# Allegro board VCU16.brd
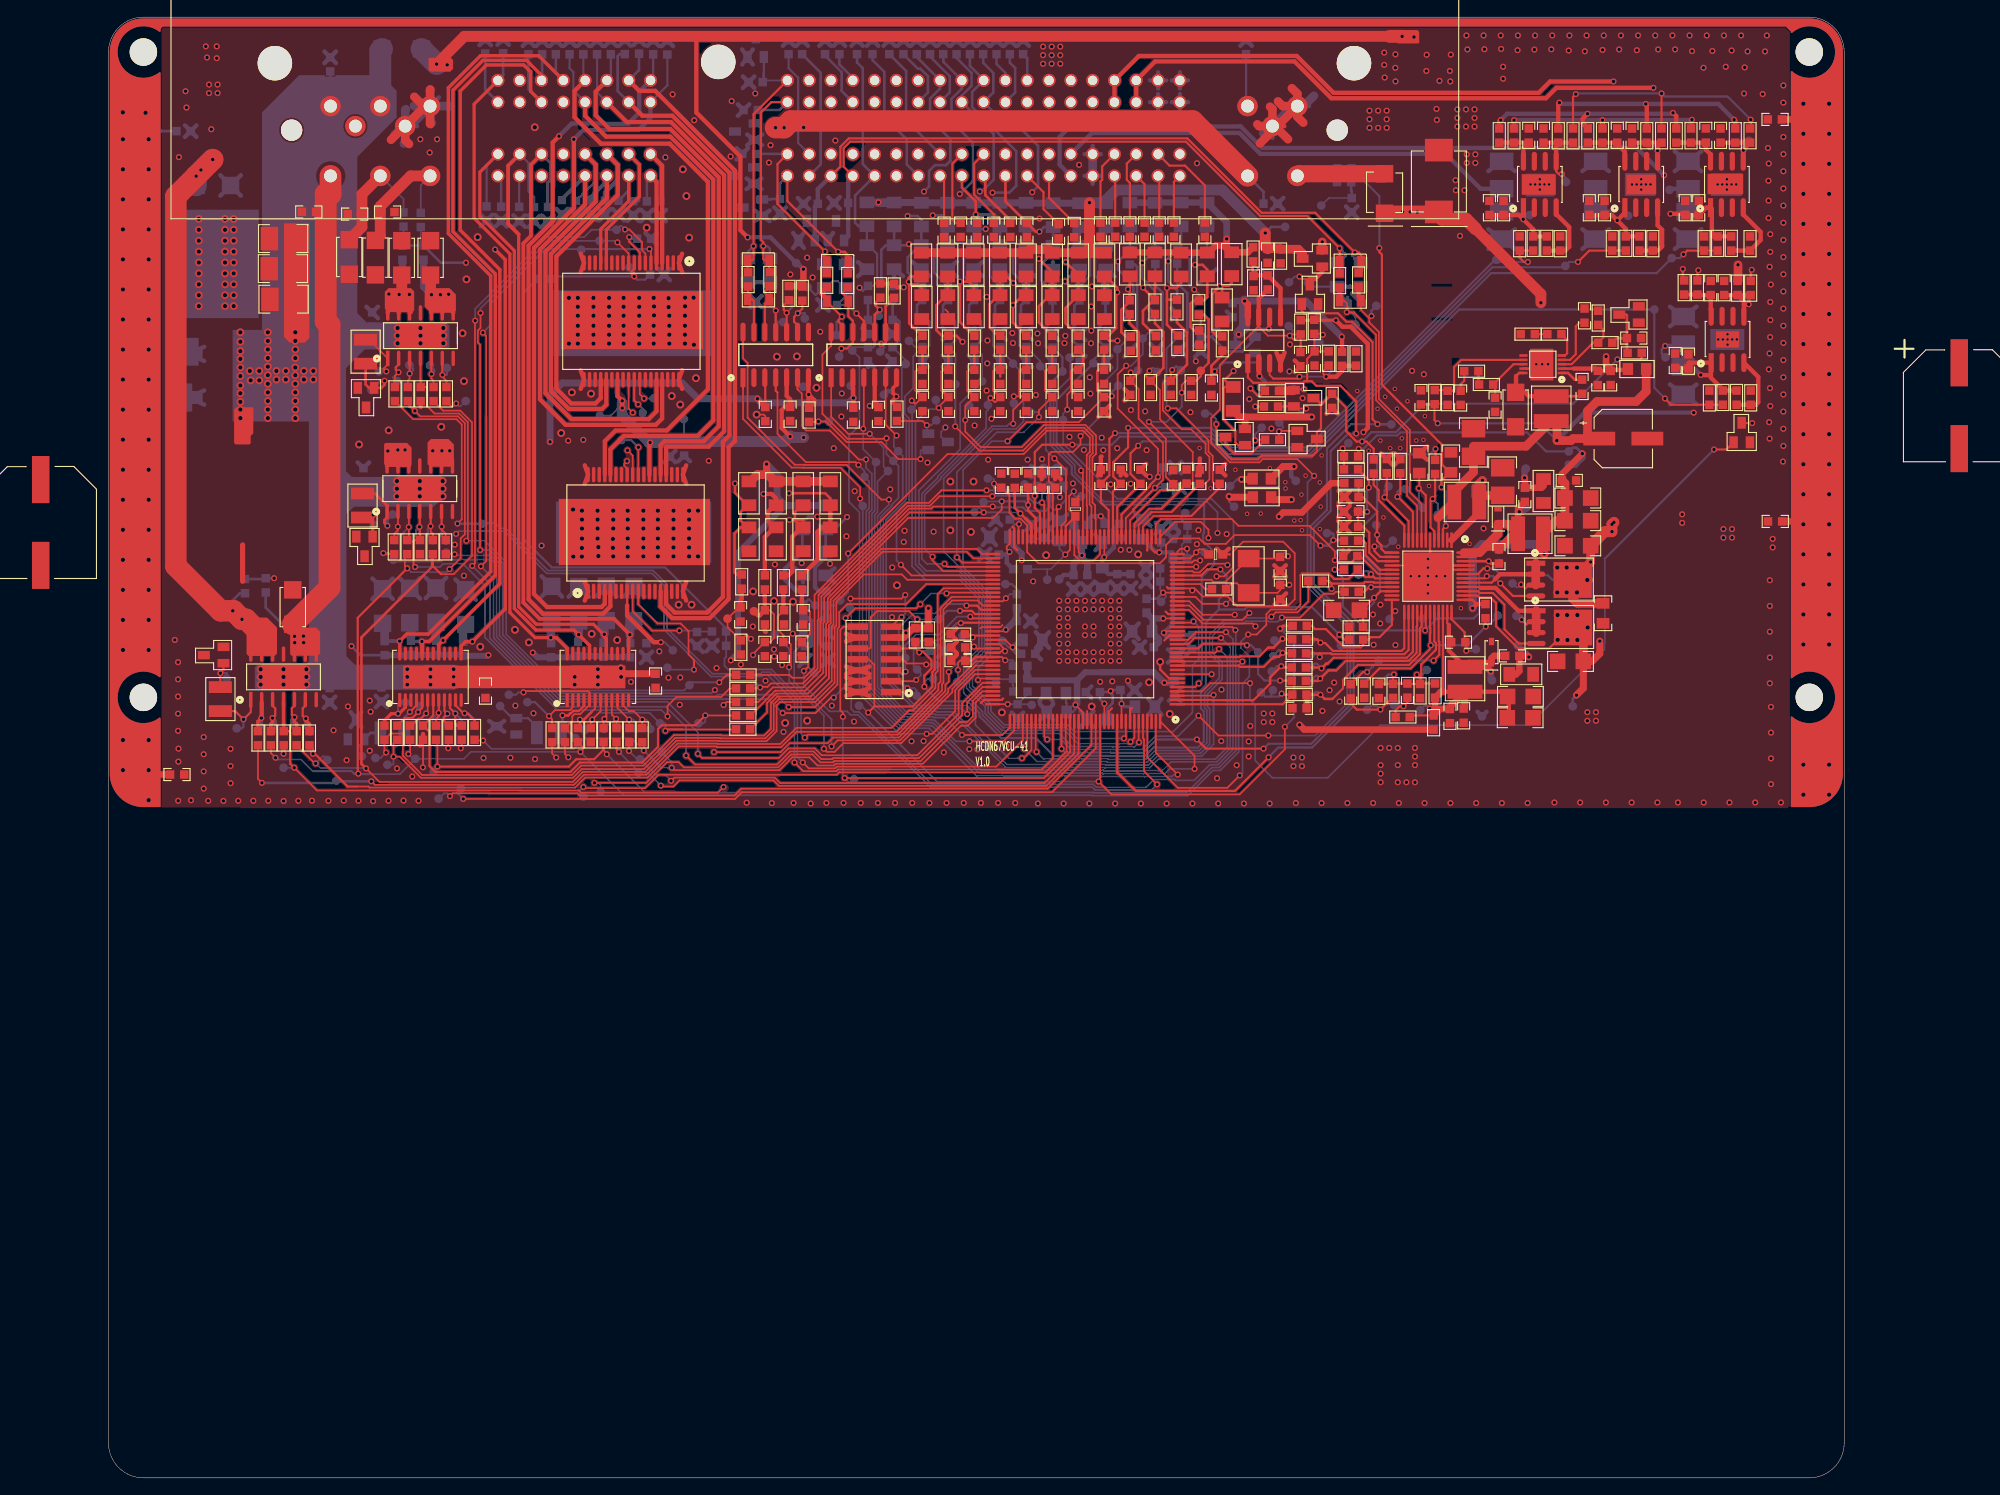
[diagram p0: board, top side]
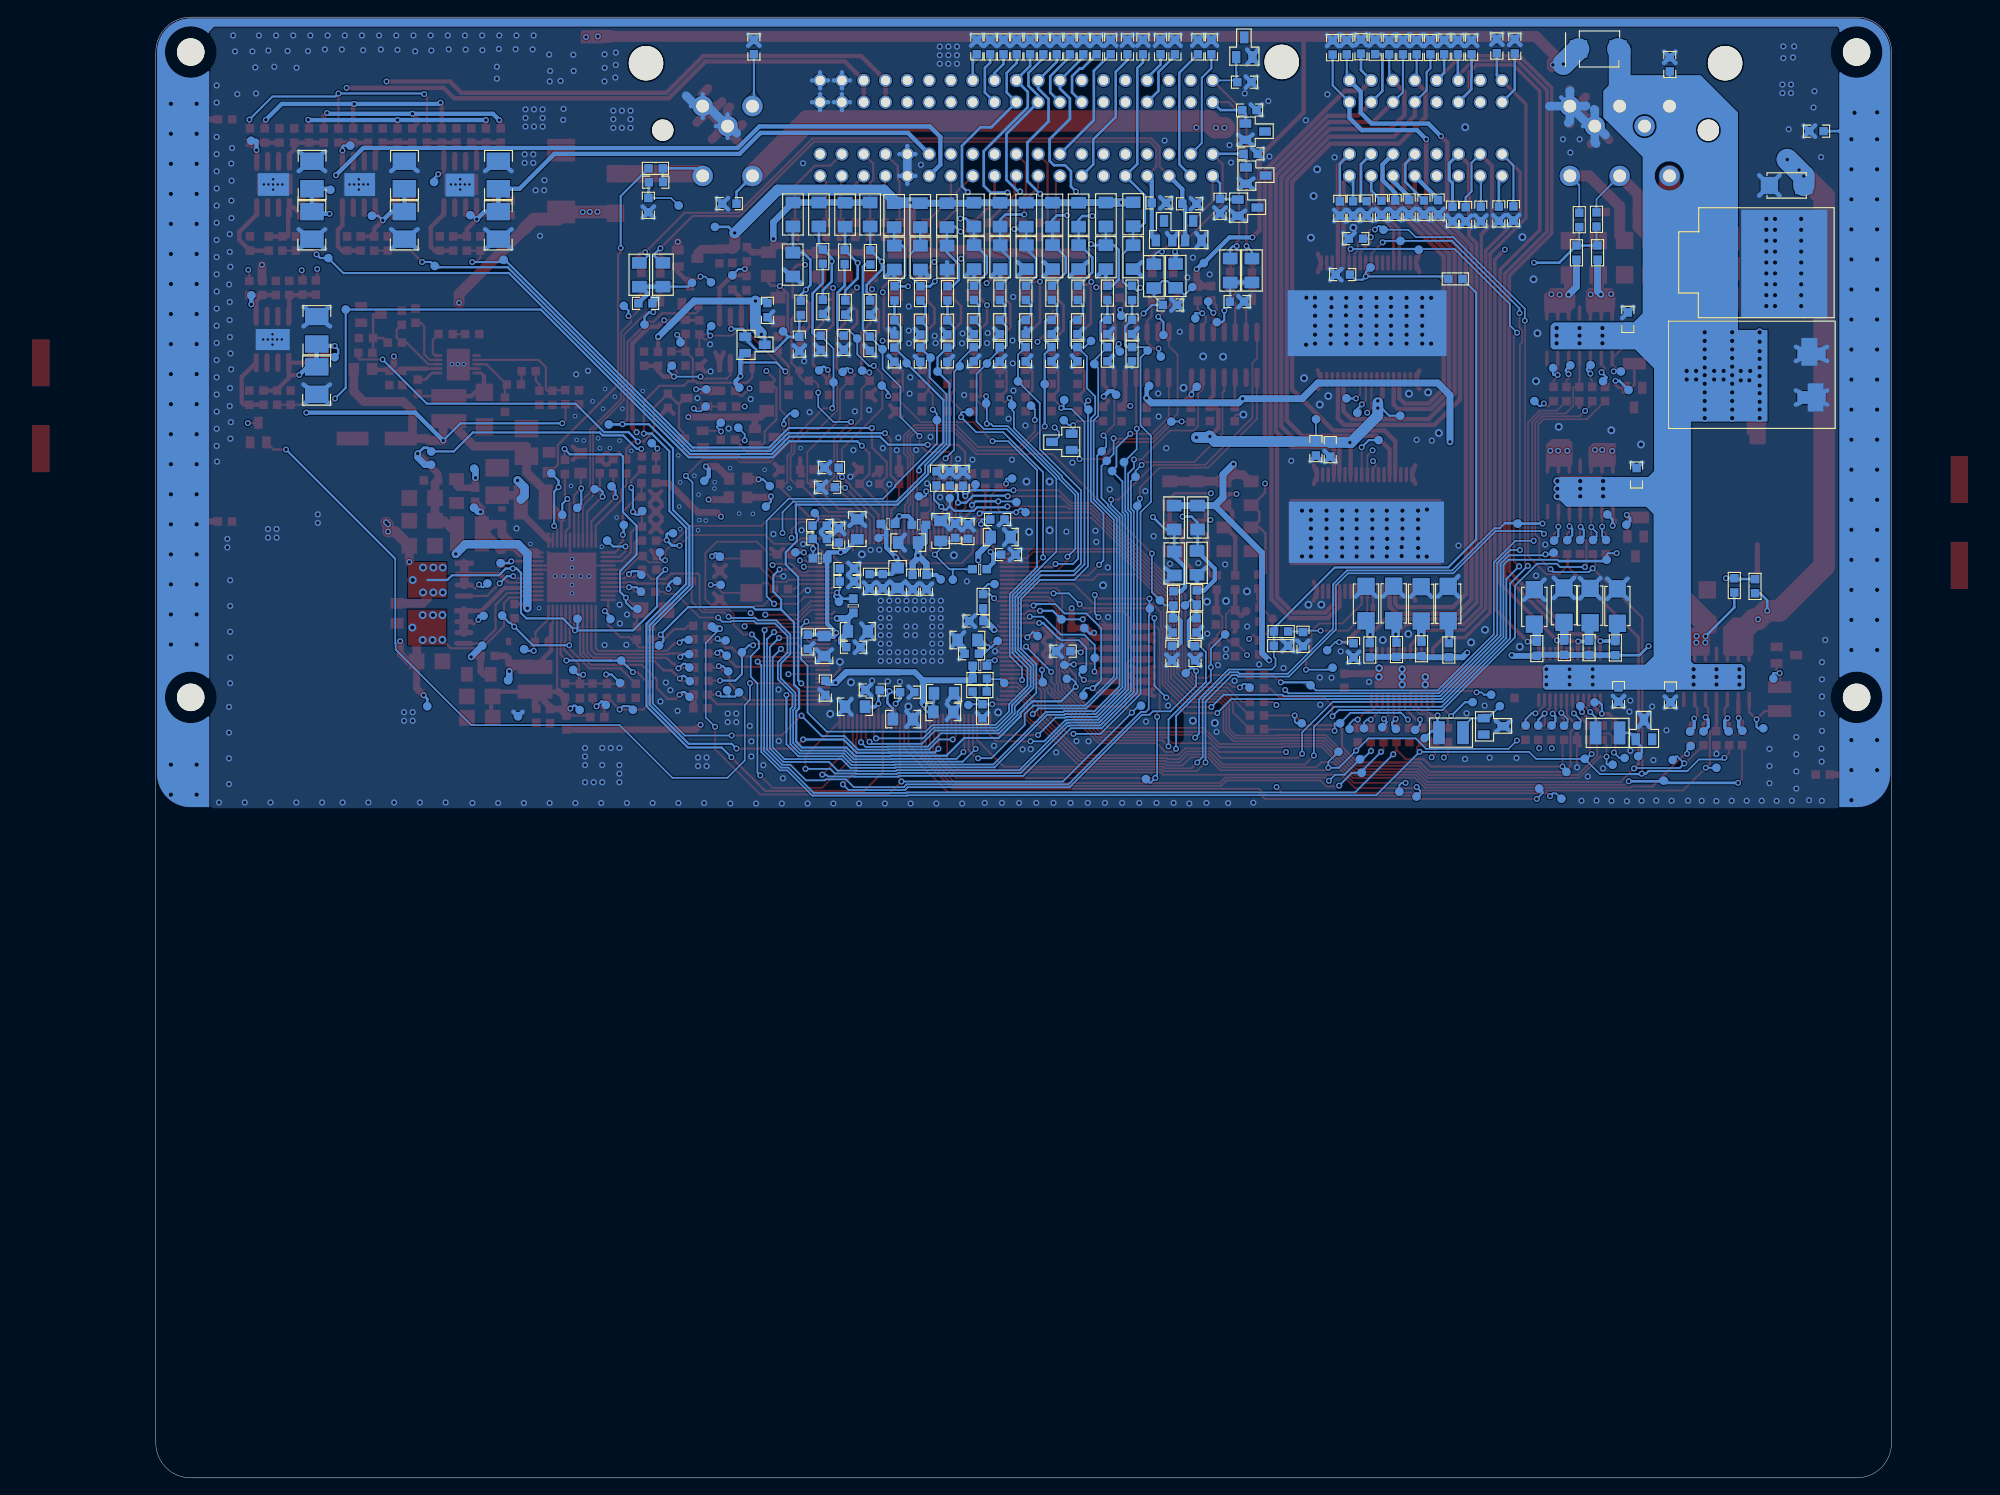
[diagram p1: board, bottom side, seen from below]

Outline 202.18 x 170.18 mm; copper layers: TOP, GND, PWR, BOTTOM. Coordinates in mm from the lower left corner of the outline.
Outline path: 0,166.12 arc(1.19,168.99) 4.06,170.18 198.12,170.18 arc(200.99,168.99) 202.18,166.12 202.18,4.06 arc(200.99,1.19) 198.12,0 4.06,0 arc(1.19,1.19) 0,4.06 0,166.12

## Design rules (mm)
constraint set DEFAULT: min track width 0.203, pair gap 10
nets with their own width: min track width 0.5; nets N32087005 N32087036 N32087068 N32087102 N32087127 N32087157 N32087196 N32087239

## Placement (name value [footprint] x y rotation side)
C200  22uF,10V  [CAPM1206X135]  171.16 114.15 0 top
C201  22uF,10V  [CAPM1206X135]  171.16 111.51 0 top
C202  10nF  [CAPM0603X85]  170.13 116.21 0 top
C203  2.2nF  [CAPM0603X85]  164.98 114.53 90 top
C204  2.2nF  [CAPM0603X85]  163.52 95.77 0 top
C205  100nF  [CAPM0603X85]  161.97 107.35 270 top
C206  22uF,10V  [CAPM1206X135]  164.44 88.54 0 top
C207  100nF  [CAPM0603X85]  156.26 88.75 270 top
C208  100nF  [CAPM0603X85]  157.23 97.36 0 top
C209  22uF,10V  [CAPM1206X135]  164.47 91.03 0 top
C210  10nF,100V  [CAPM0603X85]  143.92 150.96 0 bottom
C211  330uF,50V  [CAPPA450-1250X1350]  215.59 124.91 0 top
C212  4.7uF  [CAPM1210X200]  159 120.62 90 top
C213  4.7uF  [CAPM1210X200]  162.41 116.08 90 top
C214  220pF  [CAPM0603X85]  151.31 91.72 90 top
C215  10nF,100V  [CAPM0603X85]  144.81 148.28 270 bottom
C216  330pF  [CAPM0603X85]  157.86 88.81 270 top
C217  1nF  [CAPM0603X85]  144.7 91.64 90 top
C218  1uF,50V  [CAPM0805X110]  156.37 118.55 90 top
C219  1uF,50V  [CAPM0805X110]  174.09 100.48 270 top
C220  22pF  [CAPM0603X85]  147.98 91.67 270 top
C221  4.7uF,25V  [CAPM1206X135]  171.16 108.59 180 top
C222  1uF,50V  [CAPM0805X110]  152.69 117.99 270 top
C223  4.7uF,25V  [CAPM1206X135]  170.3 95.13 180 top
C224  2.2nF  [CAPM0603X85]  104 116.18 90 top
C225  1nF  [CAPM0603X85]  138.73 89.66 180 top
C226  10nF  [CAPM0603X85]  144.74 112.58 180 top
C227  4.7uF,25V  [CAPM1206X135]  144.22 101.09 180 top
C228  100nF  [CAPM0603X85]  135.02 142.38 270 top
C229  10nF,100V  [CAPM0603X85]  194.13 111.43 0 top
C230  10nF,100V  [CAPM0603X85]  8 81.94 180 top
C231  100nF  [CAPM0603X85]  25.82 164.68 270 bottom
C232  220uF,50V  [CAPPA450-1250X1600]  -7.9 111.31 0 top
C233  4.7uF  [CAPM1210X200]  20.4 137.31 0 top
C234  4.7uF  [CAPM1210X200]  20.32 140.87 0 top
C235  4.7uF  [CAPM1210X200]  20.35 144.37 0 top
C236  100nF  [CAPM0603X85]  25.76 91.19 90 bottom
C237  10nF,100V  [CAPM0603X85]  194.11 158.27 0 top
C238  10nF,100V  [CAPM0603X85]  8.75 156.9 180 bottom
C300  100nF  [CAPM0603X85]  186.64 138.63 90 top
C301  4.7uF  [CAPM1210X200]  183.44 127.84 90 bottom
C302  4.7uF  [CAPM1210X200]  183.44 133.71 270 bottom
C304  100nF  [CAPM0603X85]  184.05 130.07 90 top
C305  10nF,100V  [CAPM0603X85]  182.5 130.15 90 top
C306  100nF  [CAPM0603X85]  188.2 138.63 90 top
C400  10nF,100V  [CAPM0603X85]  106.98 145.39 270 top
C401  4.7nF  [CAPM0603X85]  109.98 130.86 270 bottom
C402  10nF,100V  [CAPM0603X85]  105.05 145.39 270 top
C403  4.7nF  [CAPM0603X85]  113.13 130.86 270 bottom
C404  10nF,100V  [CAPM0603X85]  101.19 145.39 270 top
C405  4.7nF  [CAPM0603X85]  103.89 130.91 270 bottom
C406  10nF,100V  [CAPM0603X85]  79.22 166.69 90 bottom
C407  4.7nF  [CAPM0603X85]  73.63 100.58 270 top
C408  10nF,100V  [CAPM0603X85]  80.8 166.69 90 bottom
C409  4.7nF  [CAPM0603X85]  76.45 96.55 270 top
C410  10nF,100V  [CAPM0603X85]  106.54 166.69 90 bottom
C411  4.7nF  [CAPM0603X85]  112.95 125.09 270 top
C412  10nF,100V  [CAPM0603X85]  103.44 166.69 90 bottom
C413  4.7nF  [CAPM0603X85]  109.93 125.09 270 top
C414  10nF,100V  [CAPM0603X85]  100.34 166.69 90 bottom
C415  4.7nF  [CAPM0603X85]  103.88 125.09 270 top
C416  4.7nF  [CAPM0603X85]  97.84 125.09 270 top
C417  10nF,100V  [CAPM0603X85]  97.24 166.69 90 bottom
C418  10nF,100V  [CAPM0603X85]  94.14 166.69 90 bottom
C419  4.7nF  [CAPM0603X85]  94.82 125.09 270 top
C420  10nF,100V  [CAPM0603X85]  83.46 166.69 90 bottom
C421  4.7nF  [CAPM0603X85]  80.92 100.25 270 top
C422  10nF,100V  [CAPM0603X85]  103.12 145.39 270 top
C423  4.7nF  [CAPM0603X85]  106.9 125.09 270 top
C424  10nF,100V  [CAPM0603X85]  99.26 145.39 270 top
C425  4.7nF  [CAPM0603X85]  100.86 125.09 270 top
C426  10nF,100V  [CAPM0603X85]  90.96 166.69 90 bottom
C427  4.7nF  [CAPM0603X85]  97.84 130.91 270 bottom
C428  10nF,100V  [CAPM0603X85]  89 166.69 90 bottom
C429  4.7nF  [CAPM0603X85]  83.82 96.09 270 bottom
C430  10nF,100V  [CAPM0603X85]  104.99 166.69 90 bottom
C431  4.7nF  [CAPM0603X85]  116.15 130.86 270 bottom
C432  4.7nF  [CAPM0603X85]  106.91 130.91 270 bottom
C433  10nF,100V  [CAPM0603X85]  101.89 166.69 90 bottom
C434  10nF,100V  [CAPM0603X85]  98.79 166.69 90 bottom
C435  4.7nF  [CAPM0603X85]  100.86 130.91 270 bottom
C436  10nF,100V  [CAPM0603X85]  95.69 166.69 90 bottom
C437  4.7nF  [CAPM0603X85]  94.82 130.91 270 bottom
C438  10nF,100V  [CAPM0603X85]  92.59 166.69 90 bottom
C439  4.7nF  [CAPM0603X85]  81.13 96.06 270 bottom
C440  10nF,100V  [CAPM0603X85]  85.14 166.69 90 bottom
C441  4.7nF  [CAPM0603X85]  78.61 96.55 270 top
C442  10nF,100V  [CAPM0603X85]  87.2 166.69 90 bottom
C443  4.7nF  [CAPM0603X85]  88.47 134.09 270 bottom
C444  10nF,100V  [CAPM0603X85]  132.51 166.69 90 bottom
C445  4.7nF  [CAPM0603X85]  115.97 128.27 270 top
C446  10nF,100V  [CAPM0603X85]  97.33 145.39 270 top
C447  4.7nF  [CAPM0603X85]  91.34 134.09 270 bottom
C500  10nF,100V  [CAPM0603X85]  124.1 145.41 270 top
C501  10nF,100V  [CAPM0603X85]  122.39 145.41 270 top
C502  10nF,100V  [CAPM0603X85]  120.68 145.41 270 top
C503  10nF,100V  [CAPM0603X85]  117.26 145.41 270 top
C504  10nF,100V  [CAPM0603X85]  127.71 145.41 270 top
C505  10nF,100V  [CAPM0603X85]  118.97 145.41 270 top
C506  10nF,100V  [CAPM0603X85]  115.55 145.41 270 top
C507  47nF  [CAPM0603X85]  124.03 116.59 90 top
C508  47nF  [CAPM0603X85]  127.13 116.64 90 top
C509  47nF  [CAPM0603X85]  125.58 116.66 90 top
C510  47nF  [CAPM0603X85]  123.91 115.41 0 bottom
C511  47nF  [CAPM0603X85]  129.43 116.64 90 top
C512  47nF  [CAPM0603X85]  123.46 117.7 0 bottom
C513  47nF  [CAPM0603X85]  110.27 116.19 90 top
C514  10nF,100V  [CAPM0603X85]  112.5 145.36 270 top
C515  10nF,100V  [CAPM0603X85]  110.67 145.24 270 top
C516  470pF  [CAPM0603X85]  128.47 127 270 top
C517  470pF  [CAPM0603X85]  127.23 132.11 270 bottom
C518  1nF  [CAPM0603X85]  140.48 130.41 270 top
C519  1nF  [CAPM0603X85]  138.85 130.33 270 top
C520  47nF  [CAPM0603X85]  130.94 136.04 270 bottom
C600  10nF,100V  [CAPM0603X85]  64.26 147.88 90 bottom
C601  10nF,100V  [CAPM0603X85]  62.71 147.9 90 bottom
C602  10nF,100V  [CAPM0603X85]  61.13 147.92 90 bottom
C603  10nF,100V  [CAPM0603X85]  59.42 147.98 90 bottom
C604  10nF,100V  [CAPM0603X85]  57.81 147.99 90 bottom
C605  10nF,100V  [CAPM0603X85]  56.18 148.04 90 bottom
C606  10nF,100V  [CAPM0603X85]  54.47 147.99 90 bottom
C607  10nF,100V  [CAPM0603X85]  52.81 148.03 90 bottom
C608  100nF  [CAPM0603X85]  67.05 119.93 270 bottom
C609  100nF  [CAPM0603X85]  62.38 144.37 0 bottom
C610  10nF,100V  [CAPM0603X85]  65.1 166.65 270 bottom
C611  10nF,100V  [CAPM0603X85]  63.45 166.67 270 bottom
C612  10nF,100V  [CAPM0603X85]  61.8 166.75 270 bottom
C613  10nF,100V  [CAPM0603X85]  60.15 166.7 270 bottom
C614  10nF,100V  [CAPM0603X85]  56.91 166.67 270 bottom
C615  10nF,100V  [CAPM0603X85]  58.51 166.67 270 bottom
C616  10nF,100V  [CAPM0603X85]  53.71 166.67 270 bottom
C617  10nF,100V  [CAPM0603X85]  55.31 166.67 270 bottom
C618  100nF  [CAPM0603X85]  65.38 119.81 270 bottom
C619  100nF  [CAPM0603X85]  62.66 96.42 270 bottom
C700  100nF  [CAPM0603X85]  63.73 92.86 270 top
C701  100pF  [CAPM0603X85]  107.12 116.19 90 top
C702  10nF,100V  [CAPM0603X85]  45.97 166.8 90 bottom
C703  10nF,100V  [CAPM0603X85]  51.14 147.24 270 bottom
C704  10nF,100V  [CAPM0603X85]  49.6 147.22 270 bottom
C705  10nF,100V  [CAPM0603X85]  44.04 147.31 270 bottom
C706  100nF  [CAPM0603X85]  43.91 91.68 270 top
C707  100pF  [CAPM0603X85]  105.56 116.16 90 top
C708  10nF,100V  [CAPM0603X85]  52.11 166.67 90 bottom
C709  10nF,100V  [CAPM0603X85]  47.84 147.25 270 bottom
C710  10nF,100V  [CAPM0603X85]  48.91 166.67 90 bottom
C711  10nF,100V  [CAPM0603X85]  50.51 166.67 90 bottom
C800  100nF  [CAPM0603X85]  30.71 134.95 90 bottom
C801  100pF  [CAPM0603X85]  108.15 116.41 90 bottom
C802  10nF,100V  [CAPM0603X85]  45.74 147.27 270 bottom
C803  10nF,100V  [CAPM0603X85]  43.88 166.77 90 bottom
C804  100nF  [CAPM0603X85]  29.69 116.81 90 bottom
C805  10nF,100V  [CAPM0603X85]  135.37 148.45 0 bottom
C806  10nF,100V  [CAPM0603X85]  23.35 147.48 180 top
C807  100pF  [CAPM0603X85]  111.25 116.44 90 bottom
C808  100nF  [CAPM0603X85]  31.8 91.26 270 bottom
C809  100pF  [CAPM0603X85]  109.69 116.42 90 bottom
C810  10nF,100V  [CAPM0603X85]  28.7 147.24 180 top
C811  10nF,100V  [CAPM0603X85]  32.49 147.47 0 top
C900  47nF  [CAPM0603X85]  112.42 104.37 270 bottom
C901  1uF,25V  [CAPM0805X110]  114.78 108.97 0 bottom
C902  10nF  [CAPM0603X85]  114.02 104.37 270 bottom
C903  100nF  [CAPM0603X85]  102.88 107.56 180 bottom
C904  1uF,25V  [CAPM0805X110]  110.77 110.57 90 bottom
C905  10nF  [CAPM0603X85]  107.57 110.24 90 bottom
C906  47nF  [CAPM0603X85]  124.19 92.03 270 bottom
C907  47nF  [CAPM0603X85]  120.93 96.77 180 bottom
C908  47nF  [CAPM0603X85]  106.6 99.82 0 bottom
C909  10uF,10V  [CAPM0805X110]  110.13 91.41 180 bottom
C910  100nF  [CAPM0603X85]  121.68 104.43 180 bottom
C911  10nF  [CAPM0603X85]  121.68 105.94 180 bottom
C912  47nF  [CAPM0603X85]  109.07 110.34 90 bottom
C913  10uF,10V  [CAPM0805X110]  110.21 89.23 180 bottom
C914  10uF,10V  [CAPM0805X110]  120.17 98.63 180 bottom
C915  100nF  [CAPM0603X85]  126.24 97.41 270 bottom
C916  100nF  [CAPM0603X85]  118.69 91.8 0 bottom
C917  100nF  [CAPM0603X85]  114.66 91.54 180 bottom
C918  100nF  [CAPM0603X85]  107.14 96.01 0 bottom
C919  100nF  [CAPM0603X85]  104.15 111.65 180 bottom
C920  100nF  [CAPM0603X85]  122.63 109.8 90 bottom
C921  47nF  [CAPM0603X85]  117.5 104.47 270 bottom
C922  1uF,25V  [CAPM0805X110]  115.77 104.6 270 bottom
C923  10nF  [CAPM0603X85]  119.05 104.47 270 bottom
C924  4.7uF,16V  [CAPM0805X110]  120.5 89.84 180 bottom
C925  4.7uF,16V  [CAPM0805X110]  115.39 88.39 0 bottom
C926  4.7uF,16V  [CAPM0805X110]  107.39 97.61 180 bottom
C927  4.7uF,16V  [CAPM0805X110]  104.01 109.6 0 bottom
C928  4.7uF,16V  [CAPM0805X110]  124.33 97.15 90 bottom
C929  4.7uF,16V  [CAPM0805X110]  120.47 110.29 270 bottom
C930  100nF  [CAPM0603X85]  98.98 96.75 180 top
C931  10nF  [CAPM0603X85]  98.98 95.21 180 top
C932  47nF  [CAPM0603X85]  124.84 109.38 180 bottom
C933  100nF  [CAPM0603X85]  124.86 110.94 180 bottom
C934  8pF  [CAPM0603X85]  136.5 103.2 270 top
C935  1nF  [CAPM0603X85]  96.48 96.31 0 bottom
C936  8pF  [CAPM0603X85]  136.47 106.48 90 top
C1000  100nF  [CAPM0603X85]  86.77 123.85 270 top
C1001  47pF  [CAPM0603X85]  74.66 154.25 180 bottom
C1002  47pF  [CAPM0603X85]  78.22 148.17 270 bottom
C1003  100nF  [CAPM0603X85]  89.69 123.93 270 top
C1004  4.7nF  [CAPM0603X85]  84.05 136.65 180 bottom
C1005  100nF  [CAPM0603X85]  76.5 123.93 270 top
C1006  47pF  [CAPM0603X85]  75.39 162.61 180 bottom
C1007  47pF  [CAPM0603X85]  74.8 159.36 180 bottom
C1008  100nF  [CAPM0603X85]  79.4 123.95 270 top
C1009  4.7nF  [CAPM0603X85]  76.25 137.03 180 bottom
C1010  47pF  [CAPM0603X85]  85.34 148.54 180 bottom
C1011  47pF  [CAPM0603X85]  81.79 148.44 180 bottom
C1012  4.7nF  [CAPM0603X85]  145.16 136.84 180 bottom
C1013  100nF  [CAPM0603X85]  165.44 156.39 90 top
C1014  4.7uF  [CAPM1210X200]  162.28 151.79 270 bottom
C1015  4.7uF  [CAPM1210X200]  162.28 145.92 90 bottom
C1016  100nF  [CAPM0603X85]  162.51 147.95 90 top
C1017  10nF,100V  [CAPM0603X85]  160.86 147.95 90 top
C1018  100nF  [CAPM0603X85]  167.16 156.39 90 top
C6381  47nF  [CAPM0603X85]  120.21 116.64 90 top
C6383  47nF  [CAPM0603X85]  117.9 116.64 90 top
C6384  100nF  [CAPM0603X85]  175.75 156.39 90 top
C6385  4.7uF  [CAPM1210X200]  173.23 145.92 90 bottom
C6386  4.7uF  [CAPM1210X200]  173.23 151.79 270 bottom
C6387  100nF  [CAPM0603X85]  174.27 147.95 90 top
C6388  10nF,100V  [CAPM0603X85]  172.49 147.95 90 top
C6389  100nF  [CAPM0603X85]  177.47 156.39 90 top
C6390  47nF  [CAPM0603X85]  115.6 116.64 90 top
C6391  100nF  [CAPM0603X85]  186.06 156.39 90 top
C6392  4.7uF  [CAPM1210X200]  184 145.92 90 bottom
C6393  4.7uF  [CAPM1210X200]  184 151.79 270 bottom
C6394  100nF  [CAPM0603X85]  185.24 147.95 90 top
C6395  10nF,100V  [CAPM0603X85]  183.67 147.95 90 top
C6396  100nF  [CAPM0603X85]  187.78 156.39 90 top
C6397  47nF  [CAPM0603X85]  108.7 116.19 90 top
C6399  10nF  [CAPM0603X85]  174.98 128.14 90 top
C6400  2.7nF  [CAPM0603X85]  157.51 125.83 270 top
C6402  100nF,100V  [CAPM0603X85]  171.65 127.13 90 top
C6403  10nF  [CAPM0603X85]  171.93 135.41 270 top
C6404  100nF  [CAPM0603X85]  152.88 125.88 270 top
C6405  150pF  [CAPM0603X85]  161.52 125.02 270 top
C6406  100nF  [CAPM0603X85]  173.48 128.14 90 top
C6407  1nF  [CAPM0603X85]  177.7 132.79 180 top
C6408  1nF  [CAPM0603X85]  68.55 97.71 270 bottom
C6409  1nF  [CAPM0603X85]  63.91 140.19 0 bottom
C6412  47uF,16V  [CAPPA450-630X570]  176.45 121.08 90 top
D200  PMEG4020EPK  [SOD2X1X40]  161.85 111.89 270 top
D201  S2J  [DIOM530X360X220]  148.64 149.63 270 top
D202  PMEG3020EJ  [SOD3X1X90]  161.1 97.44 270 top
D204  S2J  [DIOM530X360X220]  34.16 166.47 0 bottom
D205  MBRB20H100CT  [PTO263-3]  11.86 125.86 90 bottom
D206  SM8S33A  [DIOM1550X1000X500]  13.57 141.6 0 bottom
D400  BAV70LT1G  [SOT23X110-3]  139.22 125.79 0 top
D401  BAV70LT1G  [SOT23X110-3]  139.62 121.03 0 top
D500  BAV70LT1G  [SOT23X110-3]  132.38 132 180 bottom
D700  S1J  [DIOM530X260X215_BI]  61.21 101.85 270 bottom
D701  S1J  [DIOM530X260X215_BI]  57.99 101.88 270 bottom
D702  S1J  [DIOM530X260X215_BI]  54.79 101.83 270 bottom
D703  S1J  [DIOM530X260X215_BI]  51.64 101.85 270 bottom
D704  BAS21LT1G  [SOT23X110-3]  46.36 87.55 180 bottom
D705  S1J  [DIOM530X260X215_BI]  41.61 101.47 270 bottom
D706  S1J  [DIOM530X260X215_BI]  38.15 101.68 270 bottom
D707  S1J  [DIOM530X260X215_BI]  35.1 101.63 270 bottom
D708  S1J  [DIOM530X260X215_BI]  31.93 101.57 270 bottom
D709  BAS21LT1G  [SOT23X110-3]  28.83 87.2 90 bottom
D800  S1J  [DIOM530X260X215_BI]  37.52 142.14 270 top
D801  S1J  [DIOM530X260X215_BI]  34.16 142.14 270 top
D802  BAS21LT1G  [SOT23X110-3]  29.99 125.84 270 top
D803  S1J  [DIOM530X260X215_BI]  12.22 150.57 180 bottom
D804  S1J  [DIOM530X260X215_BI]  21.46 101.45 270 top
D805  BAS21LT1G  [SOT23X110-3]  12.24 95.86 180 top
D806  S1J  [DIOM530X260X215_BI]  31.09 142.16 90 top
D807  S1J  [DIOM530X260X215_BI]  28.04 142.24 90 top
D808  BAS21LT1G  [SOT23X110-3]  29.82 108.51 270 top
D1000  MMBZ33VALT1G  [SOT23X100-3]  74.04 151.72 180 bottom
D1001  MMBZ33VALT1G  [SOT23X100-3]  75 147.99 180 bottom
D1002  MMBZ33VALT1G  [SOT23X100-3]  75.39 166.69 90 bottom
D1003  MMBZ33VALT1G  [SOT23X100-3]  74.12 156.84 180 bottom
D1004  MMBZ33VALT1G  [SOT23X100-3]  84.73 145.31 90 bottom
D1005  MMBZ33VALT1G  [SOT23X100-3]  81.33 145.31 90 bottom
D1006  BAV70LT1G  [SOT23X110-3]  96.65 120.7 0 bottom
D1008  BZX84-C6V2  [SOT23X110-3]  177.11 135.53 180 top
D1009  SMC3K33CA  [DIOM800X600X265]  154.97 151.09 270 top
D1010  STPS2H100A  [DIOM530X260X215_BI]  163.91 124.46 90 top
J900  DIP14  [DSP127P6X51X460-14]  91.18 91.55 180 top
L200  22uH  [INDM4X4X280]  164.2 109.99 90 top
L201  2.2uH  [INDM4X4X280]  158.01 94.49 0 top
L202  1uH  [INDM4X4X280]  156.77 113.69 90 top
L900  BLM18EG221SN1  [INDC0603X80]  113.28 111.02 180 bottom
L901  BLM18EG221SN1  [INDC0603X80]  106.22 105.87 0 bottom
L902  BLM18EG221SN1  [INDC0603X80]  120.92 101.6 90 bottom
L903  BLM18EG221SN1  [INDC0603X80]  116.89 111.15 0 bottom
L904  BLM18EG221SN1  [INDC0603X80]  106.2 94.61 180 bottom
L905  330ohm/100M  [INDC0603X80]  112.62 112.85 270 top
L906  BLM18EG221SN1  [INDC0603X80]  124.81 107.12 180 bottom
L907  BLM18EG221SN1  [INDC0603X80]  128.97 107.58 0 top
L1000  ACT45B-510-2P  [ACT45B_5X3X300-4]  86.18 141.66 270 top
L1001  ACT45B-510-2P  [ACT45B_5X3X300-4]  76.96 141.86 270 top
L1002  ACT45B-510-2P  [ACT45B_5X3X300-4]  145.9 141.71 270 top
L1003  27uH  [INDM4X4X280]  168.05 126.02 0 top
NOREF  -  [unnamed]  198.12 90.93 0 top
NOREF#2  -  [unnamed]  4.06 90.93 0 top
NOREF#3  -  [unnamed]  198.12 166.12 0 top
NOREF#4  -  [unnamed]  4.06 166.12 0 top
Q202  MMUN2114LT1G  [SOT23X100-3]  140.23 142.06 180 top
Q203  MMUN2213LT1G  [SOT23X100-3]  139.95 137.9 90 top
Q400  MMUN2114LT1G  [SOT23X100-3]  131.24 121.26 180 top
Q401  PHPT60603PY  [SOT669-5]  166.3 101.02 0 top
Q402  PHPT60603PY  [SOT669-5]  166.26 106.56 0 top
Q404  MMUN2213LT1G  [SOT23X100-3]  190.25 121.79 90 top
R200  0R  [RESC0603X60]  154.36 88 270 top
R201  8.2R  [RESC1206X71]  167.15 114.97 90 top
R202  200R  [RESC0603X60]  150.75 88.64 0 top
R203  7.5R,5%  [RESC1206X71]  164.56 93.61 180 top
R204  4.32K,1%  [RESC0603X60]  154.53 91.72 270 top
R205  39K  [RESC0603X60]  149.63 91.69 90 top
R206  8.06K,1%  [RESC0603X60]  152.78 91.67 90 top
R207  5.1k  [RESC0603X60]  143.96 152.57 0 bottom
R208  4.32K,1%  [RESC0603X60]  144.79 115.88 180 top
R209  1K  [RESC0603X60]  138.66 92.85 0 top
R210  1K  [RESC0603X60]  138.66 94.42 0 top
R211  1K  [RESC0603X60]  138.68 96.06 0 top
R212  1K  [RESC0603X60]  138.71 97.7 0 top
R213  8.06K,1%  [RESC0603X60]  144.79 114.29 0 top
R214  1K  [RESC0603X60]  144.81 103.23 0 top
R215  1K  [RESC0603X60]  140.59 104.5 0 top
R216  5.1k  [RESC0603X60]  144.7 105.82 180 top
R217  24K  [RESC0603X60]  160.4 100.98 90 top
R218  24K  [RESC0603X60]  146.28 91.71 270 top
R219  10K  [RESC0603X60]  144.65 107.39 0 top
R220  120R  [RESC0603X60]  144.74 109.19 180 top
R221  5.1k  [RESC0603X60]  150.48 117.86 270 top
R222  5.1k  [RESC0603X60]  148.9 117.87 270 top
R223  0R  [RESC0603X60]  138.72 91.25 180 top
R224  0R  [RESC0603X60]  138.76 99.26 180 top
R225  10K  [RESC0603X60]  154.53 117.78 270 top
R226  0R  [RESC0603X60]  145.34 97.66 180 top
R227  0R  [RESC0603X60]  144.74 117.5 0 top
R228  11K,5%  [RESC0603X60]  144.74 110.82 0 top
R229  16K,5%  [RESC0603X60]  145.31 99.15 0 top
R230  11K,5%  [RESC0603X60]  144.74 119.01 180 top
R231  100k  [RESC0603X60]  136.53 142.32 90 top
R400  4.7k  [RESC1206X71]  110.04 147.12 90 bottom
R401  4.7k  [RESC1206X71]  113.13 147.12 90 bottom
R402  4.7k  [RESC1206X71]  103.84 147.17 90 bottom
R403  4.7k  [RESC1206X71]  74.6 114.71 90 top
R404  4.7k  [RESC1206X71]  77.76 114.71 90 top
R405  4.7k  [RESC1206X71]  112.97 141.35 90 top
R406  4.7k  [RESC1206X71]  109.92 141.35 90 top
R407  4.7k  [RESC1206X71]  103.83 141.35 90 top
R408  100k  [RESC0603X60]  109.97 138 270 bottom
R409  100k  [RESC0603X60]  113.11 138 270 bottom
R410  100k  [RESC0603X60]  103.86 138.05 270 bottom
R411  100k  [RESC0603X60]  73.76 104.42 270 top
R412  100k  [RESC0603X60]  76.45 104.32 270 top
R413  100k  [RESC0603X60]  112.95 132.23 270 top
R414  100k  [RESC0603X60]  109.93 132.23 270 top
R415  100k  [RESC0603X60]  103.88 132.23 270 top
R416  4.7k  [RESC1206X71]  110.02 142.16 90 bottom
R417  4.7k  [RESC1206X71]  113.12 142.16 90 bottom
R418  4.7k  [RESC1206X71]  103.83 142.21 90 bottom
R419  4.7k  [RESC1206X71]  74.6 109.35 90 top
R420  4.7k  [RESC1206X71]  77.76 109.35 90 top
R421  4.7k  [RESC1206X71]  112.97 136.4 90 top
R422  4.7k  [RESC1206X71]  109.93 136.4 90 top
R423  4.7k  [RESC1206X71]  103.85 136.4 90 top
R424  47K  [RESC0603X60]  109.98 134.04 90 bottom
R425  47K  [RESC0603X60]  113.13 134.04 90 bottom
R426  47K  [RESC0603X60]  103.87 134.09 90 bottom
R427  47K  [RESC0603X60]  73.66 96.75 90 top
R428  47K  [RESC0603X60]  76.45 100.25 90 top
R429  47K  [RESC0603X60]  112.95 128.27 90 top
R430  47K  [RESC0603X60]  109.93 128.27 90 top
R431  47K  [RESC0603X60]  103.88 128.27 90 top
R432  4.7k  [RESC1206X71]  97.73 141.35 90 top
R433  4.7k  [RESC1206X71]  94.69 141.35 90 top
R434  4.7k  [RESC1206X71]  84.09 114.71 90 top
R435  4.7k  [RESC1206X71]  106.87 141.35 90 top
R436  4.7k  [RESC1206X71]  100.78 141.35 90 top
R437  4.7k  [RESC1206X71]  97.74 147.17 90 bottom
R438  4.7k  [RESC1206X71]  83.57 111.89 90 bottom
R439  4.7k  [RESC1206X71]  116.18 147.12 90 bottom
R440  100k  [RESC0603X60]  97.84 132.23 270 top
R441  100k  [RESC0603X60]  94.82 132.23 270 top
R442  100k  [RESC0603X60]  80.77 104.32 270 top
R443  100k  [RESC0603X60]  106.9 132.23 270 top
R444  100k  [RESC0603X60]  100.86 132.23 270 top
R445  100k  [RESC0603X60]  97.8 138.05 270 bottom
R446  100k  [RESC0603X60]  83.64 102.46 270 bottom
R447  100k  [RESC0603X60]  116.14 138 270 bottom
R448  4.7k  [RESC1206X71]  97.77 136.4 90 top
R449  4.7k  [RESC1206X71]  94.73 136.4 90 top
R450  4.7k  [RESC1206X71]  84.07 109.35 90 top
R451  4.7k  [RESC1206X71]  106.89 136.4 90 top
R452  4.7k  [RESC1206X71]  100.81 136.4 90 top
R453  4.7k  [RESC1206X71]  97.73 142.21 90 bottom
R454  4.7k  [RESC1206X71]  83.54 106.53 90 bottom
R455  4.7k  [RESC1206X71]  116.16 142.16 90 bottom
R456  47K  [RESC0603X60]  97.84 128.27 90 top
R457  47K  [RESC0603X60]  94.82 128.27 90 top
R458  47K  [RESC0603X60]  80.77 96.55 90 top
R459  47K  [RESC0603X60]  106.9 128.27 90 top
R460  47K  [RESC0603X60]  100.86 128.27 90 top
R461  47K  [RESC0603X60]  97.82 134.09 90 bottom
R462  82K  [RESC0603X60]  83.72 99.31 90 bottom
R463  82K  [RESC0603X60]  116.15 134.04 90 bottom
R464  4.7k  [RESC1206X71]  106.88 147.17 90 bottom
R465  4.7k  [RESC1206X71]  100.79 147.17 90 bottom
R466  4.7k  [RESC1206X71]  94.69 147.17 90 bottom
R467  4.7k  [RESC1206X71]  80.82 111.89 90 bottom
R468  4.7k  [RESC1206X71]  80.92 114.71 90 top
R469  4.7k  [RESC1206X71]  88.34 147.22 90 bottom
R470  4.7k  [RESC1206X71]  116.01 141.35 90 top
R471  4.7k  [RESC1206X71]  91.52 147.19 90 bottom
R472  3k  [RESC1206X71]  131.01 125.7 270 top
R473  100k  [RESC0603X60]  106.88 138.05 270 bottom
R474  100k  [RESC0603X60]  100.83 138.05 270 bottom
R475  100k  [RESC0603X60]  94.78 138.05 270 bottom
R476  100k  [RESC0603X60]  80.93 102.57 270 bottom
R477  100k  [RESC0603X60]  78.61 104.32 270 top
R478  100k  [RESC0603X60]  88.47 138.05 270 bottom
R479  100k  [RESC0603X60]  115.97 132.23 270 top
R480  100k  [RESC0603X60]  91.34 138.05 270 bottom
R481  4.7k  [RESC1206X71]  106.87 142.21 90 bottom
R482  4.7k  [RESC1206X71]  100.78 142.21 90 bottom
R483  4.7k  [RESC1206X71]  94.69 142.21 90 bottom
R484  4.7k  [RESC1206X71]  80.9 106.6 90 bottom
R485  4.7k  [RESC1206X71]  80.92 109.35 90 top
R486  4.7k  [RESC1206X71]  88.34 142.21 90 bottom
R487  4.7k  [RESC1206X71]  116.01 136.4 90 top
R488  4.7k  [RESC1206X71]  91.52 142.21 90 bottom
R489  47K  [RESC0603X60]  106.9 134.09 90 bottom
R490  47K  [RESC0603X60]  100.85 134.09 90 bottom
R491  47K  [RESC0603X60]  94.82 134.09 90 bottom
R492  47K  [RESC0603X60]  80.95 99.31 90 bottom
R493  47K  [RESC0603X60]  78.69 100.25 90 top
R494  47K  [RESC0603X60]  88.47 130.91 90 bottom
R495  47K  [RESC0603X60]  115.97 125.09 90 top
R496  47K  [RESC0603X60]  91.34 130.91 90 bottom
R497  10K  [RESC0603X60]  135.52 126.65 0 top
R498  10K  [RESC0603X60]  135.41 124.82 0 top
R499  4.7K  [RESC0603X60]  135.56 120.95 0 top
R500  4.7K,1%  [RESC1206X71]  127.99 141.38 90 top
R501  4.7K,1%  [RESC1206X71]  124.94 141.35 90 top
R502  4.7K,1%  [RESC1206X71]  121.89 141.38 90 top
R503  4.7K,1%  [RESC1206X71]  118.97 141.38 90 top
R504  4.7K,1%  [RESC1206X71]  124.94 147.19 90 bottom
R505  4.7K,1%  [RESC1206X71]  121.89 147.17 90 bottom
R506  4.7K,1%  [RESC1206X71]  118.97 147.19 90 bottom
R507  68K  [RESC0603X60]  127 136.35 270 top
R508  68K  [RESC0603X60]  124.46 136.45 270 top
R509  68K  [RESC0603X60]  121.89 136.42 270 top
R510  68K  [RESC0603X60]  118.95 136.4 270 top
R511  68K  [RESC0603X60]  124.49 142.29 270 bottom
R512  68K  [RESC0603X60]  121.95 142.24 270 bottom
R513  68K  [RESC0603X60]  118.95 142.19 270 bottom
R514  47K  [RESC0603X60]  127.05 132.84 90 top
R515  47K  [RESC0603X60]  124.56 132.26 90 top
R516  47K  [RESC0603X60]  122 132.18 90 top
R517  47K  [RESC0603X60]  119.1 132.13 90 top
R518  47K  [RESC0603X60]  124.49 136.42 90 bottom
R519  47K  [RESC0603X60]  121.87 136.35 90 bottom
R520  47K  [RESC0603X60]  118.97 136.35 90 bottom
R521  12K  [RESC0603X60]  126.11 127 90 top
R522  12K  [RESC0603X60]  123.75 127 90 top
R523  12K  [RESC0603X60]  121.39 127 90 top
R524  12K  [RESC0603X60]  119.02 127 90 top
R525  12K  [RESC0603X60]  124.74 132.23 90 bottom
R526  12K  [RESC0603X60]  122.05 132.26 90 bottom
R527  12K  [RESC0603X60]  119 132.13 90 bottom
R528  4.7k  [RESC1206X71]  130.84 141.4 90 top
R529  4.7k  [RESC1206X71]  127.97 147.19 90 bottom
R530  68K  [RESC0603X60]  143.69 130.38 90 top
R531  68K  [RESC0603X60]  133.33 142.55 90 top
R532  1K  [RESC0603X60]  140.46 134.1 90 top
R533  1K  [RESC0603X60]  138.87 134.04 90 top
R534  47K  [RESC0603X60]  129.74 132.16 270 top
R535  33K  [RESC0603X60]  142.13 130.41 90 top
R536  47K  [RESC0603X60]  127.05 136.3 270 bottom
R537  4.7k  [RESC1206X71]  129.72 136.12 90 top
R538  4.7k  [RESC1206X71]  127.99 141.35 90 bottom
R539  68K  [RESC0603X60]  145.31 130.4 270 top
R540  68K  [RESC0603X60]  133.38 139.19 90 top
R541  33K  [RESC0603X60]  135.02 139.27 270 top
R700  10K  [RESC0603X60]  60.77 96.43 90 bottom
R701  10K  [RESC0603X60]  57.66 96.48 90 bottom
R702  10K  [RESC0603X60]  54.74 96.57 90 bottom
R703  10K  [RESC0603X60]  51.56 96.43 90 bottom
R704  10K  [RESC0603X60]  54.67 86.53 90 top
R705  10K  [RESC0603X60]  57.67 86.53 90 top
R706  10K  [RESC0603X60]  62.17 86.53 90 top
R707  10K  [RESC0603X60]  73.92 87.23 180 top
R708  10K  [RESC0603X60]  51.67 86.53 90 top
R709  10K  [RESC0603X60]  53.17 86.53 90 top
R710  10K  [RESC0603X60]  59.17 86.53 90 top
R711  10K  [RESC0603X60]  60.67 86.53 90 top
R712  1K,1%  [RESC0603X60]  56.17 86.53 90 top
R713  27R  [RESC1210X71]  51.31 86.82 0 bottom
R714  10K  [RESC0603X60]  41.31 96.59 90 bottom
R715  10K  [RESC0603X60]  38.12 96.72 90 bottom
R716  10K  [RESC0603X60]  35.23 96.7 90 bottom
R717  10K  [RESC0603X60]  32.17 96.67 90 bottom
R718  10K  [RESC0603X60]  35.14 86.82 90 top
R719  10K  [RESC0603X60]  38.14 86.82 90 top
R720  10K  [RESC0603X60]  42.64 86.82 90 top
R721  10K  [RESC0603X60]  73.92 88.83 180 top
R722  10K  [RESC0603X60]  32.14 86.82 90 top
R723  10K  [RESC0603X60]  33.64 86.82 90 top
R724  10K  [RESC0603X60]  39.64 86.82 90 top
R725  10K  [RESC0603X60]  41.14 86.82 90 top
R726  1K,1%  [RESC0603X60]  36.64 86.82 90 top
R727  27R  [RESC1210X71]  33.07 86.79 0 bottom
R800  10K  [RESC0603X60]  36.7 142.75 270 bottom
R801  10K  [RESC0603X60]  34.24 142.75 270 bottom
R802  10K  [RESC0603X60]  33.37 126.27 90 top
R803  10K  [RESC0603X60]  34.87 126.27 90 top
R804  10K  [RESC0603X60]  73.93 93.54 180 top
R805  10K  [RESC0603X60]  39.37 126.27 90 top
R806  10K  [RESC0603X60]  37.87 126.27 90 top
R807  1K,1%  [RESC0603X60]  36.37 126.27 90 top
R808  27R  [RESC1210X71]  29.95 131.2 90 top
R809  10K  [RESC0603X60]  15.9 103.89 270 bottom
R810  10K  [RESC0603X60]  18.31 103.99 270 bottom
R811  10K  [RESC0603X60]  17.41 86.17 90 top
R812  10K  [RESC0603X60]  18.91 86.17 90 top
R813  10K  [RESC0603X60]  73.92 90.39 180 top
R814  10K  [RESC0603X60]  23.41 86.17 90 top
R815  10K  [RESC0603X60]  21.91 86.17 90 top
R816  1K,1%  [RESC0603X60]  20.41 86.17 90 top
R817  27R  [RESC1210X71]  13.03 90.73 270 top
R818  10K  [RESC0603X60]  36.37 146.56 90 bottom
R819  10K  [RESC0603X60]  34.37 146.61 90 bottom
R820  10K  [RESC0603X60]  33.28 108.44 90 top
R821  10K  [RESC0603X60]  34.78 108.44 90 top
R822  10K  [RESC0603X60]  73.92 91.97 180 top
R823  10K  [RESC0603X60]  39.28 108.44 90 top
R824  10K  [RESC0603X60]  37.78 108.44 90 top
R825  1K,1%  [RESC0603X60]  36.28 108.44 90 top
R826  27R  [RESC1210X71]  29.59 113.28 90 top
R900  10K  [RESC0603X60]  105.82 102.13 270 bottom
R901  10K  [RESC0603X60]  98.93 98.3 180 top
R902  0R  [RESC0603X60]  106.22 91.61 180 bottom
R903  33K  [RESC0603X60]  105.89 89.31 90 bottom
R904  3.3K,5%  [RESC0603X60]  106.2 93.12 180 bottom
R905  0R  [RESC0805X65]  134.37 114.25 180 top
R906  0R  [RESC0805X65]  134.34 116.41 180 top
R907  4.7K  [RESC0603X60]  93.98 98.17 90 top
R908  0R  [RESC0603X60]  129.36 103.56 180 top
R909  4.7K  [RESC0603X60]  95.53 98.18 90 top
R1000  0R  [RESC0603X60]  83.67 139.55 270 top
R1001  62R  [RESC1206X71]  85.93 140 90 bottom
R1002  62R  [RESC1206X71]  83.39 140.03 90 bottom
R1003  0R  [RESC0603X60]  86.11 139.52 270 top
R1004  1K  [RESC0603X60]  89.92 138.32 270 top
R1005  10K  [RESC0603X60]  91.52 138.3 270 top
R1006  0R  [RESC0603X60]  74.5 139.62 270 top
R1007  62R  [RESC1206X71]  77.04 140.67 90 bottom
R1008  62R  [RESC1206X71]  74.5 140.67 90 bottom
R1009  0R  [RESC0603X60]  77.04 139.65 270 top
R1010  1K  [RESC0603X60]  79.25 138.02 270 top
R1011  10K  [RESC0603X60]  80.82 137.97 90 top
R1012  0R  [RESC0603X60]  143.41 139.51 270 top
R1013  0R  [RESC0603X60]  145.62 139.58 270 top
R1014  62R  [RESC1206X71]  145.86 140.17 90 bottom
R1015  62R  [RESC1206X71]  143.11 140.17 90 bottom
R1016  10K  [RESC0603X60]  91.85 123.95 270 top
R1017  10K  [RESC0603X60]  81.61 123.85 270 top
R1018  100k  [RESC0603X60]  142.54 125.48 90 top
R1019  1K  [RESC0603X60]  191.29 138.63 270 top
R1020  47K  [RESC0603X60]  189.76 138.63 270 top
R9020  47K  [RESC0603X60]  188.05 125.85 90 top
R9021  5.1K,1%  [RESC0603X60]  189.64 125.85 90 top
R9023  10K,1%  [RESC0603X60]  191.29 125.85 270 top
R9024  47K  [RESC0603X60]  186.48 125.85 270 top
R9025  47K  [RESC0603X60]  168.88 156.39 270 top
R9026  1K  [RESC0603X60]  170.6 156.39 270 top
R9027  5.1K,1%  [RESC0603X60]  167.54 143.81 90 top
R9028  47K  [RESC0603X60]  165.95 143.81 90 top
R9029  10K,1%  [RESC0603X60]  169.1 143.81 270 top
R9030  47K  [RESC0603X60]  164.38 143.81 270 top
R9031  47K  [RESC0603X60]  179.19 156.39 270 top
R9032  1K  [RESC0603X60]  180.91 156.39 270 top
R9033  5.1K,1%  [RESC0603X60]  178.33 143.81 90 top
R9034  47K  [RESC0603X60]  176.74 143.81 90 top
R9035  10K,1%  [RESC0603X60]  179.89 143.81 270 top
R9036  47K  [RESC0603X60]  175.17 143.81 270 top
R9037  47K  [RESC0603X60]  189.5 156.39 270 top
R9038  1K  [RESC0603X60]  191.22 156.39 270 top
R9039  5.1K,1%  [RESC0603X60]  189.03 143.81 90 top
R9040  47K  [RESC0603X60]  187.44 143.81 90 top
R9041  10K,1%  [RESC0603X60]  191.22 143.81 270 top
R9042  47K  [RESC0603X60]  185.87 143.81 270 top
R9044  20k  [RESC0603X60]  174.35 132.26 180 top
R9045  30k  [RESC0603X60]  173.53 135.15 270 top
R9046  150K,1%  [RESC0603X60]  154.48 125.91 270 top
R9047  10K,1%  [RESC0603X60]  155.98 125.83 90 top
R9048  7.5K  [RESC0603X60]  160.48 127.38 0 top
R9050  0R  [RESC0603X60]  183.54 138.68 270 top
R9051  0R  [RESC0603X60]  162 156.39 270 top
R9052  0R  [RESC0603X60]  172.31 156.39 270 top
R9053  0R  [RESC0603X60]  182.63 156.39 270 top
R9054  120K  [RESC0603X60]  168.43 133.25 0 top
R9055  20k  [RESC0603X60]  165.33 133.25 0 top
R9056  1K  [RESC0603X60]  158.75 128.93 0 top
R9057  0R  [RESC0805X65]  178.05 129.18 0 top
R9058  0R  [RESC0603X60]  177.77 131.06 180 top
R9059  0R  [RESC0603X60]  147.38 117.83 270 top
R9060  47K  [RESC0603X60]  71.12 96.95 0 bottom
R9061  4.7K  [RESC0603X60]  50.79 139.68 0 bottom
R9062  4.7K  [RESC0603X60]  71.12 98.6 180 bottom
R9063  0R  [RESC0603X60]  185.09 138.68 270 top
R9064  0R  [RESC0603X60]  163.72 156.39 270 top
R9065  0R  [RESC0603X60]  174.03 156.39 270 top
R9066  0R  [RESC0603X60]  184.34 156.39 270 top
TP200  -  [TP40]  170.1 118.03 180 bottom
TP201  -  [TP40]  165.13 113.03 180 bottom
TP202  -  [TP40]  165.1 117.58 180 bottom
TP203  -  [TP40]  161.16 92.91 180 bottom
TP204  -  [TP40]  152.81 89.46 180 bottom
TP205  -  [TP40]  80.11 141.53 180 bottom
TP206  -  [TP40]  159.66 114 180 bottom
TP207  -  [TP40]  164.16 96.95 180 bottom
TP208  -  [TP40]  149.76 90.04 180 bottom
TP209  -  [TP40]  141.27 148.23 180 bottom
TP210  -  [TP40]  162.03 106.58 180 bottom
TP211  -  [TP40]  159.28 96.54 180 bottom
TP212  -  [TP40]  148.11 92.61 180 bottom
TP213  -  [TP40]  153.06 100.09 180 bottom
TP214  -  [TP40]  146.61 89.48 180 bottom
TP215  -  [TP40]  156.13 117.04 180 bottom
TP216  -  [TP40]  147.97 95.21 180 bottom
TP217  -  [TP40]  153.57 94.13 180 bottom
TP219  -  [TP40]  133.91 96.19 180 bottom
TP220  -  [TP40]  135.51 93.95 180 bottom
TP221  -  [TP40]  139.98 92.81 180 bottom
TP222  -  [TP40]  135.69 95.78 180 bottom
TP223  -  [TP40]  140.03 94.41 180 bottom
TP224  -  [TP40]  147.68 111.02 180 bottom
TP225  -  [TP40]  135.81 97.56 180 bottom
TP226  -  [TP40]  140.11 97.64 180 bottom
TP227  -  [TP40]  140.06 95.96 180 bottom
TP228  -  [TP40]  163.56 104.21 180 bottom
TP229  -  [TP40]  141.45 104.5 180 bottom
TP230  -  [TP40]  145.67 103.25 180 bottom
TP231  -  [TP40]  138.3 116.15 180 bottom
TP234  -  [TP40]  164.01 100.43 180 bottom
TP235  -  [TP40]  143.46 107.82 180 bottom
TP236  -  [TP40]  145.62 105.21 180 bottom
TP237  -  [TP40]  170.56 89.89 180 bottom
TP238  -  [TP40]  151.05 115.19 180 bottom
TP239  -  [TP40]  161.85 100.46 180 bottom
TP240  -  [TP40]  149.1 115.52 180 bottom
TP241  -  [TP40]  102.44 116.43 180 bottom
TP242  -  [TP40]  141.94 110.06 180 bottom
TP243  -  [TP40]  149.61 109.19 180 bottom
TP244  -  [TP40]  154.84 112.19 180 bottom
TP245  -  [TP40]  149.23 100.05 180 bottom
TP246  -  [TP40]  140 90.98 180 bottom
TP247  -  [TP40]  135.64 91.77 180 bottom
TP248  -  [TP40]  137.41 99.19 180 bottom
TP249  -  [TP40]  145.52 112.65 180 bottom
TP250  -  [TP40]  143.56 96.98 180 bottom
TP251  -  [TP40]  146.08 101.24 180 bottom
TP252  -  [TP40]  134.24 91.52 180 bottom
TP253  -  [TP40]  144.42 120.55 180 bottom
TP254  -  [TP40]  159.99 88.72 180 bottom
TP255  -  [TP40]  170.1 119.58 180 bottom
TP256  -  [TP40]  137.06 145.75 180 bottom
TP257  -  [TP40]  149.43 122.73 180 bottom
TP258  -  [TP40]  137.52 139.29 180 bottom
TP260  -  [TP40]  23.88 106.91 180 bottom
TP400  -  [TP40]  111.12 128.9 180 bottom
TP401  -  [TP40]  111.94 130.51 180 bottom
TP402  -  [TP40]  105.36 129.82 180 bottom
TP403  -  [TP40]  72.11 100.1 0 top
TP404  -  [TP40]  75.18 100.96 0 top
TP405  -  [TP40]  111.2 123.24 180 bottom
TP406  -  [TP40]  107.4 124.17 180 bottom
TP407  -  [TP40]  102.44 124.99 180 bottom
TP408  -  [TP40]  96.37 125.58 180 bottom
TP409  -  [TP40]  93.55 124.46 180 bottom
TP410  -  [TP40]  82.22 93.75 180 bottom
TP411  -  [TP40]  105.46 125.2 180 bottom
TP412  -  [TP40]  100.25 124.92 180 bottom
TP413  -  [TP40]  98.64 127.42 180 bottom
TP414  -  [TP40]  85.22 102.23 180 bottom
TP415  -  [TP40]  114.73 129.87 180 bottom
TP416  -  [TP40]  108.53 129.51 180 bottom
TP417  -  [TP40]  101.75 127.75 180 bottom
TP418  -  [TP40]  93.24 132.46 180 bottom
TP419  -  [TP40]  82.3 101.65 180 bottom
TP420  -  [TP40]  77.62 98.27 180 bottom
TP421  -  [TP40]  86.64 131.34 180 bottom
TP422  -  [TP40]  117.63 127.25 180 bottom
TP423  -  [TP40]  92.86 129.77 180 bottom
TP424  -  [TP40]  138.05 126.82 180 bottom
TP426  -  [TP40]  138.13 124.82 180 bottom
TP427  -  [TP40]  134.34 122.35 180 bottom
TP428  -  [TP40]  136.37 122.94 180 bottom
TP500  -  [TP40]  127.23 128.98 0 top
TP501  -  [TP40]  124.92 129.03 180 bottom
TP502  -  [TP40]  122.17 128.85 180 bottom
TP503  -  [TP40]  119.91 129.01 180 bottom
TP504  -  [TP40]  123.24 127.63 180 bottom
TP505  -  [TP40]  120.47 132.74 180 bottom
TP506  -  [TP40]  117.53 131.5 180 bottom
TP507  -  [TP40]  134.21 127.03 180 bottom
TP508  -  [TP40]  142.06 129.57 180 bottom
TP509  -  [TP40]  141.06 132.29 180 bottom
TP510  -  [TP40]  129.13 133.58 180 bottom
TP511  -  [TP40]  135.03 140.11 180 bottom
TP512  -  [TP40]  137.48 134.19 180 bottom
TP600  -  [TP40]  55.07 143.08 180 bottom
TP601  -  [TP40]  59.18 145.41 180 bottom
TP602  -  [TP40]  62.22 124.08 180 bottom
TP603  -  [TP40]  63.49 125.77 180 bottom
TP604  -  [TP40]  59.74 120.9 180 bottom
TP605  -  [TP40]  57.2 144.12 180 bottom
TP606  -  [TP40]  60.68 141.02 180 bottom
TP607  -  [TP40]  57.23 123.75 180 bottom
TP608  -  [TP40]  86.46 127.23 180 bottom
TP611  -  [TP40]  65.1 94.39 180 bottom
TP613  -  [TP40]  67.03 123.34 180 bottom
TP614  -  [TP40]  65.74 96.42 180 bottom
TP700  -  [TP40]  25.78 100.6 180 bottom
TP701  -  [TP40]  35.74 83.77 180 bottom
TP702  -  [TP40]  37.87 82.25 180 bottom
TP703  -  [TP40]  55.5 87.15 180 bottom
TP704  -  [TP40]  64.41 84.61 180 bottom
TP705  -  [TP40]  57.73 87.25 180 bottom
TP706  -  [TP40]  63.12 87.25 180 bottom
TP707  -  [TP40]  101.93 113.69 180 bottom
TP708  -  [TP40]  64.24 87.91 180 bottom
TP709  -  [TP40]  55.33 79.38 180 bottom
TP710  -  [TP40]  57.33 79.94 180 bottom
TP711  -  [TP40]  48.79 90.37 180 bottom
TP712  -  [TP40]  61.93 83.72 180 bottom
TP713  -  [TP40]  61.72 82.14 180 bottom
TP714  -  [TP40]  46.63 91.24 180 bottom
TP715  -  [TP40]  59.33 87.45 180 bottom
TP716  -  [TP40]  61.44 87.33 180 bottom
TP717  -  [TP40]  54.38 86.18 180 bottom
TP718  -  [TP40]  45.62 89.92 180 bottom
TP721  -  [TP40]  36.63 87.63 180 bottom
TP722  -  [TP40]  42.62 87.66 180 bottom
TP723  -  [TP40]  68.71 87.91 180 bottom
TP725  -  [TP40]  38.15 87.63 180 bottom
TP726  -  [TP40]  100.86 112.5 180 bottom
TP727  -  [TP40]  31.09 83.87 180 bottom
TP728  -  [TP40]  32.49 83.08 180 bottom
TP729  -  [TP40]  34.59 90.35 180 bottom
TP730  -  [TP40]  36.25 89.92 180 bottom
TP731  -  [TP40]  41.05 80.3 180 bottom
TP732  -  [TP40]  38.45 79.13 180 bottom
TP733  -  [TP40]  39.6 87.66 180 bottom
TP734  -  [TP40]  41.15 87.66 180 bottom
TP737  -  [TP40]  29.51 84.07 180 bottom
TP800  -  [TP40]  43.54 111.18 180 bottom
TP801  -  [TP40]  33.6 127.76 180 bottom
TP803  -  [TP40]  35.05 129.64 180 bottom
TP804  -  [TP40]  106.71 115.75 180 bottom
TP805  -  [TP40]  67.67 92.35 180 bottom
TP806  -  [TP40]  41.61 125.45 180 bottom
TP807  -  [TP40]  39.42 129.31 180 bottom
TP808  -  [TP40]  25.5 83.64 180 bottom
TP809  -  [TP40]  37.41 129.62 180 bottom
TP810  -  [TP40]  31.52 128.9 180 bottom
TP811  -  [TP40]  30.63 126.75 180 bottom
TP812  -  [TP40]  26.54 81.23 180 bottom
TP813  -  [TP40]  17.37 87.05 180 bottom
TP814  -  [TP40]  18.97 86.97 180 bottom
TP815  -  [TP40]  109.7 114.15 180 bottom
TP816  -  [TP40]  20.4 82.73 180 bottom
TP817  -  [TP40]  23.39 85.27 180 bottom
TP818  -  [TP40]  23.47 86.94 180 bottom
TP819  -  [TP40]  21.89 86.97 180 bottom
TP820  -  [TP40]  13.77 93.12 180 bottom
TP821  -  [TP40]  33.17 106.96 180 bottom
TP822  -  [TP40]  33.25 109.27 180 bottom
TP823  -  [TP40]  34.77 109.27 180 bottom
TP824  -  [TP40]  74.78 92.07 180 bottom
TP825  -  [TP40]  36.27 109.27 180 bottom
TP826  -  [TP40]  39.34 107.8 180 bottom
TP827  -  [TP40]  39.32 109.19 180 bottom
TP828  -  [TP40]  37.77 109.25 180 bottom
TP829  -  [TP40]  30.89 111.05 180 bottom
TP830  -  [TP40]  14.94 87.33 180 bottom
TP831  -  [TP40]  33.1 112.24 180 bottom
TP900  -  [TP40]  131.11 113.16 180 bottom
TP901  -  [TP40]  110.74 104.67 180 bottom
TP902  -  [TP40]  130.66 115.54 180 bottom
TP903  -  [TP40]  109.35 104.65 180 bottom
TP904  -  [TP40]  122.61 102.06 180 bottom
TP905  -  [TP40]  118.01 109.5 180 bottom
TP906  -  [TP40]  98.86 92.68 180 bottom
TP908  -  [TP40]  113.31 114.35 180 bottom
TP909  -  [TP40]  125.43 112.39 180 bottom
TP910  -  [TP40]  136.37 104.04 180 bottom
TP911  -  [TP40]  136.47 107.31 180 bottom
TP912  -  [TP40]  96.06 93.09 180 bottom
TP914  -  [TP40]  127.69 107.82 180 bottom
TP915  -  [TP40]  94.13 91.14 180 bottom
TP916  -  [TP40]  94.18 94.18 180 bottom
TP917  -  [TP40]  92.81 95.53 180 bottom
TP918  -  [TP40]  96.36 94.71 180 bottom
TP919  -  [TP40]  87.43 89.97 180 bottom
TP920  -  [TP40]  94.03 99.01 180 bottom
TP921  -  [TP40]  96.7 100.03 180 bottom
TP922  -  [TP40]  86.39 101.27 180 bottom
TP923  -  [TP40]  86.85 81.42 180 bottom
TP1000  -  [TP40]  84.81 133.15 180 bottom
TP1001  -  [TP40]  90.81 117.3 180 bottom
TP1002  -  [TP40]  89.41 118.34 180 bottom
TP1003  -  [TP40]  85.12 130.63 180 bottom
TP1004  -  [TP40]  91.41 118.49 180 bottom
TP1005  -  [TP40]  89.74 135.38 180 bottom
TP1006  -  [TP40]  81.43 138.73 180 bottom
TP1007  -  [TP40]  89.89 131.22 180 bottom
TP1008  -  [TP40]  92 119.61 180 bottom
TP1009  -  [TP40]  87.86 113.23 180 bottom
TP1010  -  [TP40]  88.06 116.64 180 bottom
TP1011  -  [TP40]  78.59 134.65 180 bottom
TP1012  -  [TP40]  79.6 137.06 180 bottom
TP1013  -  [TP40]  81.1 135.08 180 bottom
TP1014  -  [TP40]  145.26 134.37 180 bottom
TP1015  -  [TP40]  147.68 136.55 180 bottom
TP1016  -  [TP40]  139.72 139.23 180 bottom
TP1017  -  [TP40]  90.32 126.19 180 bottom
TP1018  -  [TP40]  96.42 123.22 180 bottom
TP1020  -  [TP40]  80.92 127.13 180 bottom
TP1021  -  [TP40]  83.9 123.06 180 bottom
TP1022  -  [TP40]  153.09 113 180 bottom
TP1023  -  [TP40]  127.74 124 180 bottom
TP1024  -  [TP40]  181.36 130.56 180 bottom
TP1025  -  [TP40]  180.06 136.12 180 bottom
TP1026  -  [TP40]  191.06 137.77 180 bottom
TP1027  -  [TP40]  165.56 147.12 180 bottom
TP1028  -  [TP40]  161.67 141.91 180 bottom
TP1029  -  [TP40]  169.77 150.98 180 bottom
TP1030  -  [TP40]  177.01 147.04 180 bottom
TP1031  -  [TP40]  169.7 141.2 180 bottom
TP1032  -  [TP40]  179.53 155.22 180 bottom
TP1033  -  [TP40]  181.84 150.06 180 bottom
TP1034  -  [TP40]  182.09 142.11 180 bottom
TP1035  -  [TP40]  191.08 155.78 180 bottom
TP1040  -  [TP40]  104.11 97.51 180 bottom
TP1041  -  [TP40]  104.48 104.12 180 bottom
TP1042  -  [TP40]  99.47 98.07 180 bottom
TP1043  -  [TP40]  107.54 90.04 180 bottom
TP1044  -  [TP40]  103.35 92.61 180 bottom
U200  MC33FS6501CAE  [PLQFP50P9X9X150-48]  153.69 105.05 270 top
U500  NCV2903  [SOIC6X175-8]  132.72 129.84 90 top
U600  TLE7230R  [PSOP65P13X350-36]  60.91 134.75 270 top
U601  TLE7230R  [PSOP65P13X350-36]  61.39 110.08 90 top
U700  BTT6200-4EMA  [PSSOP65P6X170-24]  57.01 93.31 90 top
U701  BTT6200-4EMA  [PSSOP65P6X170-24]  37.5 93.31 90 top
U800  BTT6030-2EKA  [PSOP127P6X175-14]  36.34 133.07 90 top
U801  BTT6030-2EKA  [PSOP127P6X175-14]  20.39 93.31 90 top
U802  BTT6030-2EKA  [PSOP127P6X175-14]  36.26 115.24 90 top
U900  SPC5744PFK1MLQ9  [LQFP50P22X22X150-144]  113.75 98.88 180 top
U1000  TJA1043T  [SOIC6X175-14]  87.99 130.84 90 top
U1001  TJA1043T  [SOIC6X175-14]  77.72 130.84 90 top
U1004  TLE4253E  [PSOIC6X170-8]  188.59 132.63 90 top
U1005  TLE4253E  [PSOIC6X170-8]  166.73 150.69 90 top
U1006  TLE4253E  [PSOIC6X170-8]  178.54 150.69 90 top
U1007  TLE4253E  [PSOIC6X170-8]  188.52 150.69 90 top
U1010  TPS57160-Q1  [MSOP50P490X110]  169.29 128.73 180 top
X1  121PIN  [CONN_1241434-1]  21.33 157.02 180 top
Y900  8.000MHz  [XTALC370P5032X100_2]  132.82 105.11 270 top

## Library data of the parts
C200 C201 C206 C209 C228 C238 C300-C302 C304-C306 C401 C403 C405 C407 C409 C411 C413 C415-C447 C505 C506 C512-C520 C600-C619 C706-C711 C800-C811 C935 C1003 C1008 C1013-C1018 C6381 C6383-C6397 C6399 C6400 C6402-C6409 = CAP
C202 C210 C215 C226 C229 C230 C237 C400 C402 C404 C406 C408 C410 C412 C414 C500-C504 C702-C705 C902 C905 C911 C923 C931 = CAP: signal model: DEFAULT_CAPACITOR_10000pF_1_2
C203 C204 C224 = CAP: signal model: DEFAULT_CAPACITOR_2200pF_1_2
C205 C207 C208 C231 C236 C700 C903 C915-C920 C933 C1000 C1005 = CAP: signal model: DEFAULT_CAPACITOR_100000pF_1_2
C211 = CAP2: Tolerance: -1mm; signal model: DEFAULT_CAPACITOR_3.3e+09pF_1_2
C212 C213 C221 C223 C227 C233-C235 C924-C929 = CAP: signal model: DEFAULT_CAPACITOR_4.7e+06pF_1_2
C214 = CAP: signal model: DEFAULT_CAPACITOR_220.000000pF_1_2
C216 = CAP: signal model: DEFAULT_CAPACITOR_330.000000pF_1_2
C217 C225 = CAP: signal model: DEFAULT_CAPACITOR_1000pF_1_2
C218 C219 C222 C901 C904 C922 = CAP: signal model: DEFAULT_CAPACITOR_1e+06pF_1_2
C220 = CAP: signal model: DEFAULT_CAPACITOR_22.000000pF_1_2
C232 = CAP2: Tolerance: -1mm; signal model: DEFAULT_CAPACITOR_2.2e+08pF_1_2
C507-C511 C900 C906-C910 C912 C921 C930 C932 = CAP: signal model: DEFAULT_CAPACITOR_47000pF_1_2
C701 = CAP: signal model: DEFAULT_CAPACITOR_100.000000pF_1_2
C913 C914 = CAP: signal model: DEFAULT_CAPACITOR_1e+07pF_1_2
C934 C936 = CAP: signal model: DEFAULT_CAPACITOR_8.000000pF_1_2
C1001 C1002 C1006 C1007 C1010 C1011 = CAP: signal model: DEFAULT_CAPACITOR_47.000000pF_1_2
C1004 C1009 C1012 = CAP: signal model: DEFAULT_CAPACITOR_4700pF_1_2
C6412 = CAP2
D200 = schottky
D201 D204 = S2J
D202 = SCHOTTKY
D205 = MBRB20H100CT
D206 = TvsSM8S26A
D400 D401 D500 D1006 = BAV70
D700-D703 D705-D708 D800 D801 D803 D804 D806 D807 D1010 = S1J
D704 D709 D802 D805 D808 = BAS21
D1000-D1005 = tvsMMBZ27VCLT1
D1008 = zenerBZX8-C
D1009 = Tvs5KP16CA
J900 = HEAD2X7
L200 L1003 = inductor
L201 L202 = inductor: signal model: DEFAULT_INDUCTOR_0.001nH_1_2
L900-L907 = ferrites
L1000-L1002 = filterZJYS81
Q202 Q400 = MMUN2114
Q203 Q404 = MMUN2233
Q401 Q402 = PHPT60603PY
R200 R223 R224 R226 R227 R908 R1000 R1003 R1006 R1009 R1012 R1013 = RES0603: signal model: DEFAULT_RESISTOR_0.001OHM_1_2
R201 R203 R416-R423 R432-R439 R448-R455 R464-R472 R481-R488 R505 R506 R528 R529 R537 R538 = RES1206
R202 = RES0603: signal model: DEFAULT_RESISTOR_200.000000OHM_1_2
R204 R208 = RES0603: signal model: DEFAULT_RESISTOR_4320OHM_1_2
R205 = RES0603: signal model: DEFAULT_RESISTOR_39000OHM_1_2
R206 R213 = RES0603: signal model: DEFAULT_RESISTOR_8060OHM_1_2
R207 R216 R221 R222 = RES0603: signal model: DEFAULT_RESISTOR_5100OHM_1_2
R209-R212 R214 R215 R424-R431 R440-R447 R456-R463 R473-R480 R489-R499 R508 R511-R513 R519 R520 R526 R527 R530-R536 R539-R541 R700-R703 R714-R726 R800-R807 R809-R816 R818-R825 R900-R904 R907 R909 R1018-R1020 R9020 R9021 R9023-R9042 R9044-R9048 R9050-R9056 R9058-R9066 = RES0603
R217 R218 = RES0603: signal model: DEFAULT_RESISTOR_24000OHM_1_2
R219 R225 R231 R704-R711 R1005 R1011 R1016 R1017 = RES0603: signal model: DEFAULT_RESISTOR_10000OHM_1_2
R220 = RES0603: signal model: DEFAULT_RESISTOR_120.000000OHM_1_2
R228 R230 = RES0603: signal model: DEFAULT_RESISTOR_11000OHM_1_2
R229 = RES0603: signal model: DEFAULT_RESISTOR_16000OHM_1_2
R400-R407 R500-R504 = RES1206: signal model: DEFAULT_RESISTOR_4700OHM_1_2
R408-R415 = RES0603: signal model: DEFAULT_RESISTOR_68000OHM_1_2
R507 R509 R510 R514-R518 R521-R525 = RES0603: signal model: DEFAULT_RESISTOR_47000OHM_1_2
R712 R1004 R1010 = RES0603: signal model: DEFAULT_RESISTOR_1000.000000OHM_1_2
R713 = RES1210: signal model: DEFAULT_RESISTOR_27.000000OHM_1_2
R727 R808 R817 R826 = RES1210
R905 R906 R9057 = RES0805
R1001 R1002 R1007 R1008 R1014 R1015 = RES1206: signal model: DEFAULT_RESISTOR_62.000000OHM_1_2
TP200-TP217 TP219-TP231 TP234-TP258 TP260 TP400-TP424 TP426-TP428 TP500-TP512 TP600-TP608 TP611 TP613 TP614 TP700-TP718 TP721-TP723 TP725-TP734 TP737 TP800 TP801 TP803-TP831 TP900-TP906 TP908-TP912 TP914-TP923 TP1000-TP1018 TP1020-TP1035 TP1040-TP1044 = TP160
U200 = MC33FS6501CAE
U500 = opaLM2904_2
U600 U601 = TLE7230R_0
U700 U701 = BTT6200-4EMA
U800-U802 = BTT6030-2EKA
U900 = SPC574P_5
U1000 U1001 = TJA1041A
U1004-U1007 = TLE4253E
U1010 = TPS54040-Q1
X1 = 1241434-1
Y900 = oscillator

## Footprints (pads in the part's own frame, mm; a bottom-side part is the same pattern mirrored in y, then rotated)
ACT45B_5X3X300-4
  rect 1.346x0.889 smd: 1(0,0) 2(0,-2.5) 3(4.55,-2.5) 4(4.55,0)
CAPM0603X85
  rect 0.991x0.991 smd: 1(-0.825,0) 2(0.825,0)
CAPM0805X110
  rect 1.245x1.499 smd: 1(-1.4,0) 2(0.925,0)
CAPM1206X135
  rect 1.829x1.829 smd: 1(-1.5,0) 2(1.5,0)
CAPM1210X200
  rect 2.032x2.743 smd: 1(-1.6,0) 2(1.6,0)
CAPPA450-630X570
  rect 1.6x3.708 smd: 1(0,2.8) 2(0,-2.8)
CAPPA450-1250X1350
  rect 2.032x5.486 smd: 1(0,5) 2(0,-5)
CAPPA450-1250X1600
  rect 2.032x5.486 smd: 1(0,5) 2(0,-5)
CONN_1241434-1
  round 4.013 hole 4.013 unplated: (-123.75,-7.8) (-49.7,-7.95) (1.95,-7.8)
  round 2.489 hole 2.489 unplated: (-121.8,0) (0,0)
  round 2.388 hole 1.499: 1(-117.15,-2.8) 2(-111.35,-2.8) 3(-114.25,-0.47) 4(-117.15,5.33) 5(-111.35,5.33) 114(-16.13,-2.8) 115(-10.33,-2.8) 116(-4.53,-2.8) 117(-13.23,-0.47) 118(-7.43,-0.47) 119(-16.13,5.33) 120(-10.33,5.33) 121(-4.53,5.33)
  round 1.524 hole 1.092: 6(-57.75,5.33) 7(-60.29,5.33) 8(-62.83,5.33) 9(-65.37,5.33) 10(-67.91,5.33) 11(-70.45,5.33) 12(-72.99,5.33) 13(-75.53,5.33) 14(-78.07,5.33) 15(-80.61,5.33) 16(-83.15,5.33) 17(-85.69,5.33) 18(-88.23,5.33) 19(-90.77,5.33) 20(-93.31,5.33) 21(-95.85,5.33) 22(-98.39,5.33) 23(-100.93,5.33) 24(-103.47,5.33) 25(-57.75,2.79) 26(-60.29,2.79) 27(-62.83,2.79) 28(-65.37,2.79) 29(-67.91,2.79) 30(-70.45,2.79) 31(-72.99,2.79) 32(-75.53,2.79) 33(-78.07,2.79) 34(-80.61,2.79) 35(-83.15,2.79) 36(-85.69,2.79) 37(-88.23,2.79) 38(-90.77,2.79) 39(-93.31,2.79) 40(-95.85,2.79) 41(-98.39,2.79) 42(-100.93,2.79) 43(-103.47,2.79) 44(-57.75,-3.26) 45(-60.29,-3.26) 46(-62.83,-3.26) 47(-65.37,-3.26) 48(-67.91,-3.26) 49(-70.45,-3.26) 50(-72.99,-3.26) 51(-75.53,-3.26) 52(-78.07,-3.26) 53(-80.61,-3.26) 54(-83.15,-3.26) 55(-85.69,-3.26) 56(-88.23,-3.26) 57(-90.77,-3.26) 58(-93.31,-3.26) 59(-95.85,-3.26) 60(-98.39,-3.26) 61(-100.93,-3.26) 62(-103.47,-3.26) 63(-57.75,-5.8) 64(-60.29,-5.8) 65(-62.83,-5.8) 66(-65.37,-5.8) 67(-67.91,-5.8) 68(-70.45,-5.8) 69(-72.99,-5.8) 70(-75.53,-5.8) 71(-78.07,-5.8) 72(-80.61,-5.8) 73(-83.15,-5.8) 74(-85.69,-5.8) 75(-88.23,-5.8) 76(-90.77,-5.8) 77(-93.31,-5.8) 78(-95.85,-5.8) 79(-98.39,-5.8) 80(-100.93,-5.8) 81(-103.47,-5.8) 82(-41.81,-5.8) 83(-39.27,-5.8) 84(-36.73,-5.8) 85(-34.19,-5.8) 86(-31.65,-5.8) 87(-29.11,-5.8) 88(-26.57,-5.8) 89(-24.03,-5.8) 90(-41.81,-3.26) 91(-39.27,-3.26) 92(-36.73,-3.26) 93(-34.19,-3.26) 94(-31.65,-3.26) 95(-29.11,-3.26) 96(-26.57,-3.26) 97(-24.03,-3.26) 98(-41.81,2.79) 99(-39.27,2.79) 100(-36.73,2.79) 101(-34.19,2.79) 102(-31.65,2.79) 103(-29.11,2.79) 104(-26.57,2.79) 105(-24.03,2.79) 106(-41.81,5.33) 107(-39.27,5.33) 108(-36.73,5.33) 109(-34.19,5.33) 110(-31.65,5.33) 111(-29.11,5.33) 112(-26.57,5.33) 113(-24.03,5.33)
DIOM530X260X215_BI
  rect 2.032x2.032 smd: 1(-2.007,0) 2(2.007,0)
DIOM530X360X220
  rect 2.032x2.032 smd: 1(-2.3,0) 2(2.3,0)
DIOM800X600X265
  rect 2.642x3.251 smd: 1(-3.6,0) 2(3.6,0)
DIOM1550X1000X500
  rect 9.144x11.2 smd: 1(-0.992,-0.02)
  rect 4.1x5.1 smd: 2(8.369,0)
DSP127P6X51X460-14
  rect 2.388x0.762 smd: 1(0,0) 2(3.9,0) 3(0,-1.27) 4(3.9,-1.27) 5(0,-2.54) 6(3.9,-2.54) 7(0,-3.81) 8(3.9,-3.81) 9(0,-5.08) 10(3.9,-5.08) 11(0,-6.35) 12(3.9,-6.35) 13(0,-7.62) 14(3.9,-7.62)
INDC0603X80
  rect 1.041x0.991 smd: 1(-0.825,0) 2(0.825,0)
INDM4X4X280
  rect 4.064x1.626 smd: 1(0,0) 2(0,-2.9)
